# Allegro board 2019-09-09.brd
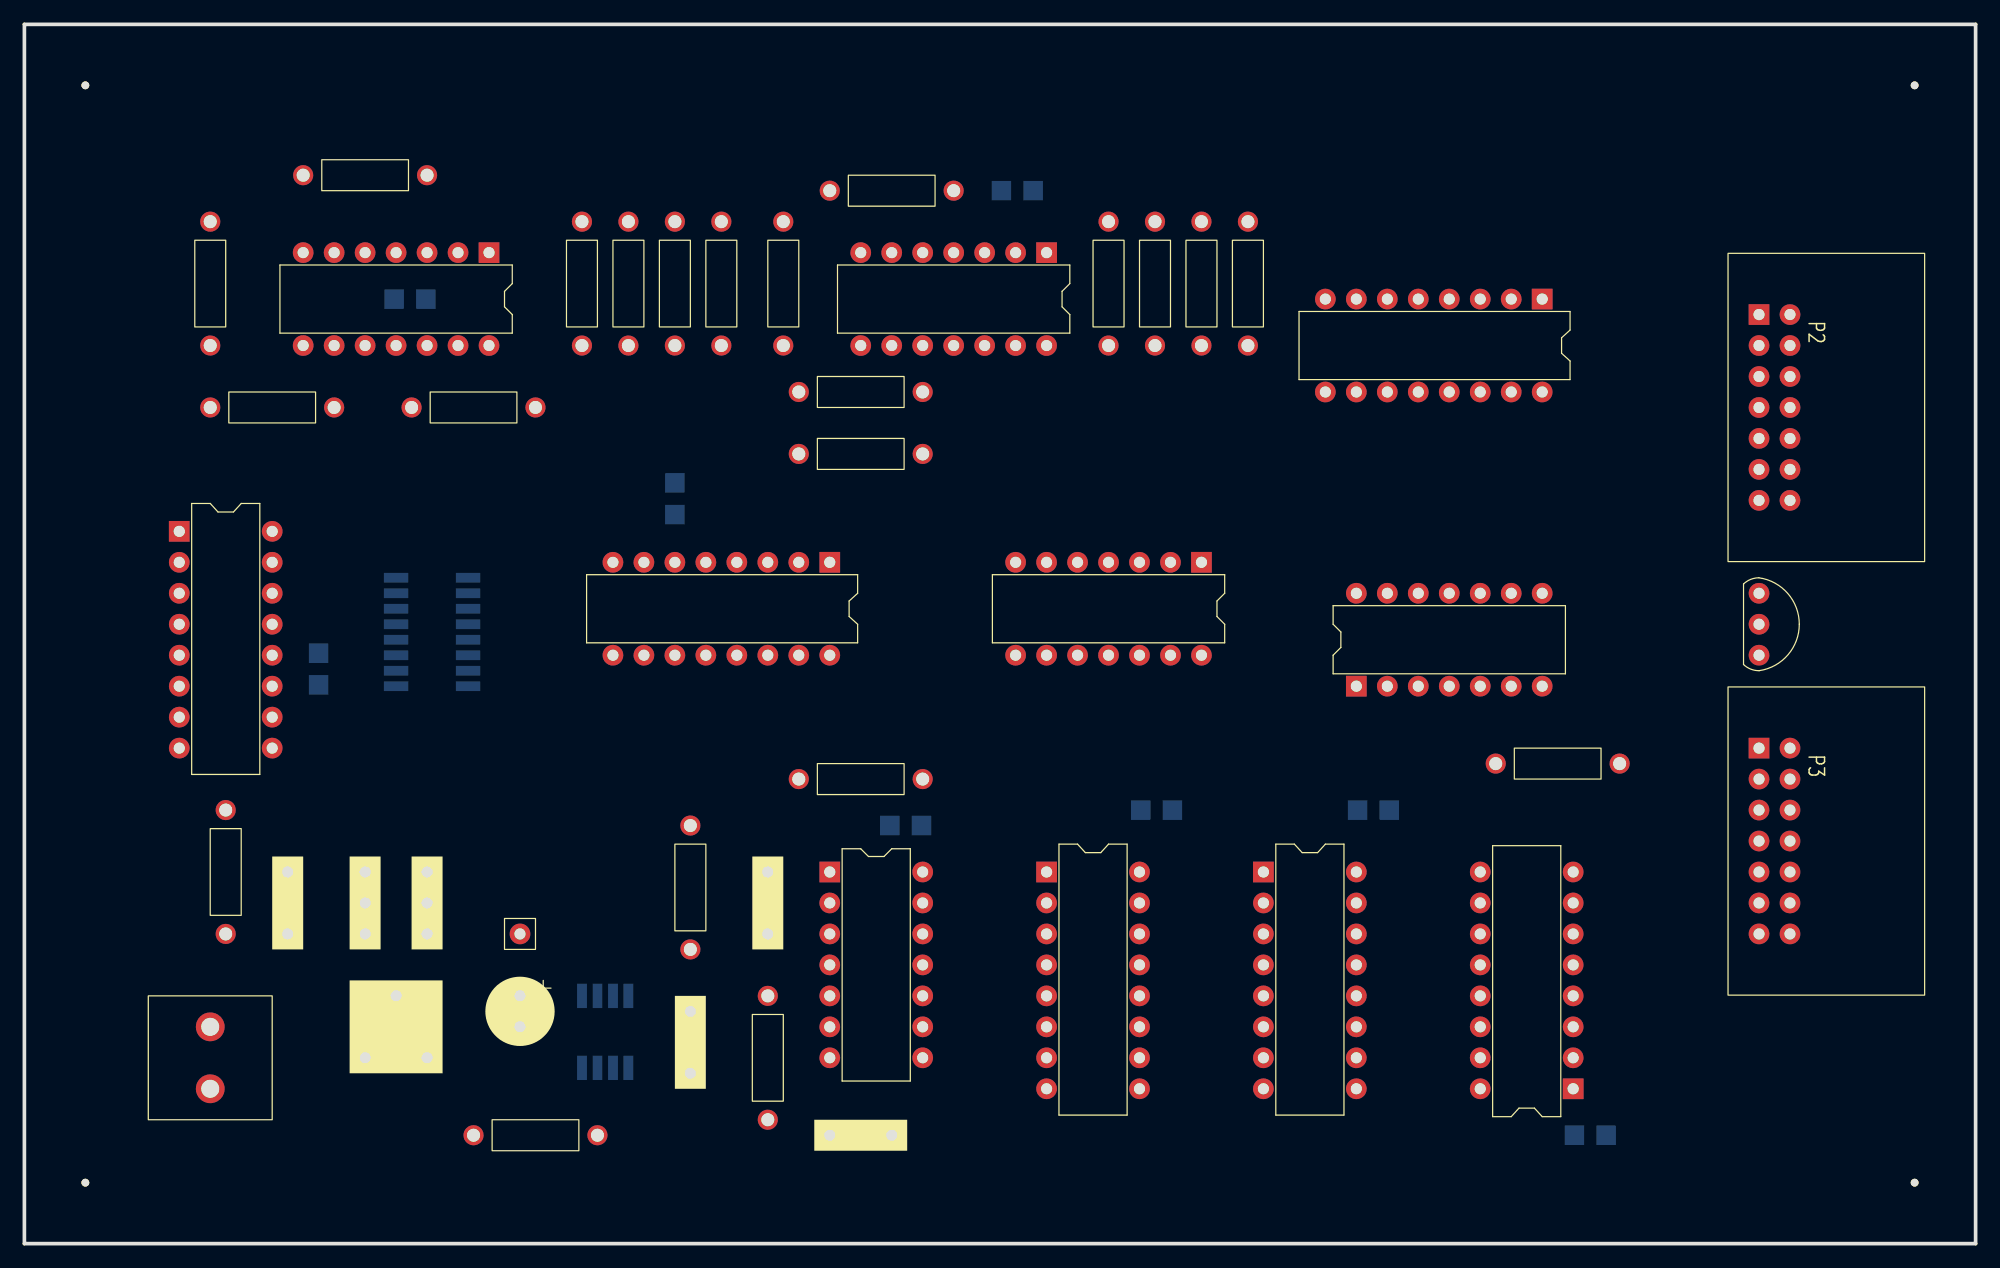
[diagram p0: board, top side]
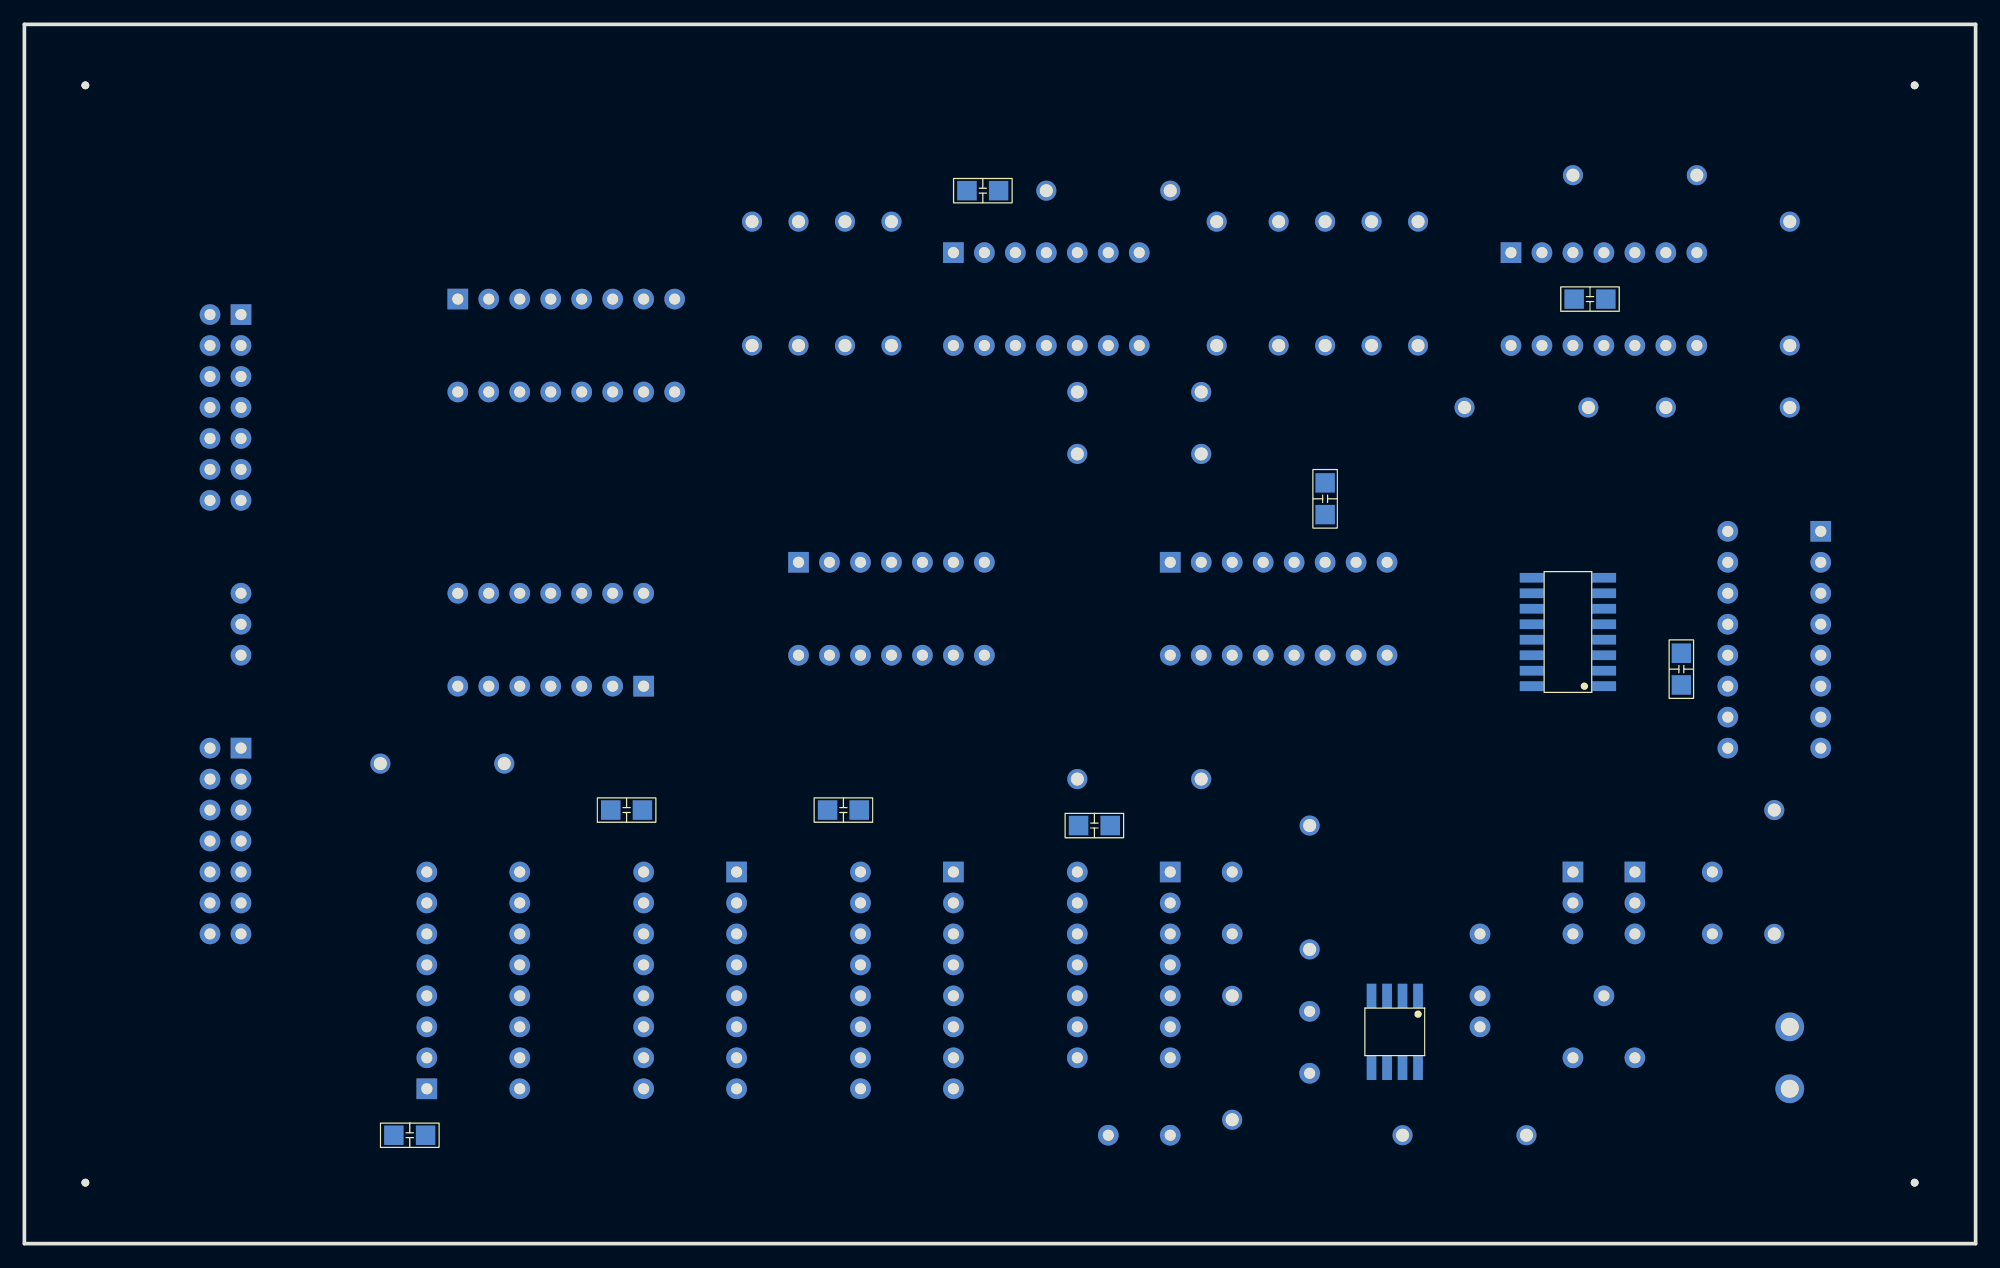
[diagram p1: board, bottom side, seen from below]

Outline 160 x 100 mm; copper layers: TOP, BOTTOM. Coordinates in mm from the lower left corner of the outline.
Outline path: 0,100 0,0 160,0 160,100 0,100

## Design rules (mm)
nets with their own width: min track width 0.5; nets +5V GND

## Placement (name value [footprint] x y rotation side)
C1  10uF  [CAP196]  40.64 20.32 0 top
C2  0.1uF  [CAP300]  54.61 13.97 90 top
C3  0.1uF  [CAP300]  21.59 25.4 90 top
C4  0.001uF  [CAP300]  60.96 30.48 270 top
C5  0.001uF  [CAP300]  71.12 8.89 180 top
C6  0.1uF  [SMDCAP]  33.02 77.47 180 bottom
C7  0.1uF  [SMDCAP]  80.01 86.36 0 bottom
C8  0.1uF  [SMDCAP]  53.34 59.69 90 bottom
C9  0.1uF  [SMDCAP]  109.22 35.56 0 bottom
C10  0.1uF  [SMDCAP]  91.44 35.56 0 bottom
C11  0.1uF  [SMDCAP]  24.13 45.72 90 bottom
C12  0.1uF  [SMDCAP]  127 8.89 0 bottom
C13  0.1uF  [SMDCAP]  73.66 34.29 180 bottom
NOREF  -  [unnamed]  155 5 0 top
NOREF#2  -  [unnamed]  155 95 0 top
NOREF#3  -  [#2]  0 0 90 top
NOREF#4  -  [unnamed]  5 95 0 top
NOREF#5  -  [#2]  0 0 0 top
NOREF#6  -  [unnamed]  5 5 0 top
P1  CON2  [POWER2]  15.24 17.78 270 top
P2  CON14  [JUMPER14]  142.24 76.2 270 top
P3  CON14  [JUMPER14]  142.24 40.64 270 top
Q1  2SC1815  [TO92]  142.24 53.34 270 top
R1  10K  [RES400]  36.83 8.89 270 top
R2  10K  [RES400]  33.02 87.63 90 top
R3  10K  [RES400]  15.24 83.82 180 top
R4  10K  [RES400]  15.24 68.58 270 top
R5  10K  [RES400]  31.75 68.58 270 top
R6  10K  [RES400]  76.2 86.36 90 top
R7  10K  [RES400]  62.23 83.82 180 top
R8  10K  [RES400]  63.5 69.85 270 top
R9  10K  [RES400]  73.66 64.77 90 top
R10  4.7K  [RES400]  45.72 73.66 0 top
R11  4.7K  [RES400]  49.53 73.66 0 top
R12  4.7K  [RES400]  53.34 73.66 0 top
R13  4.7K  [RES400]  57.15 73.66 0 top
R14  4.7K  [RES400]  92.71 73.66 0 top
R15  4.7K  [RES400]  88.9 73.66 0 top
R16  4.7K  [RES400]  100.33 73.66 0 top
R17  4.7K  [RES400]  96.52 73.66 0 top
R18  10K  [RES400]  16.51 35.56 180 top
R19  150  [RES400]  54.61 34.29 180 top
R20  150  [RES400]  60.96 10.16 0 top
R21  10K  [RES400]  63.5 38.1 270 top
R22  10K  [RES400]  130.81 39.37 90 top
TP1  TP  [JUMPER1]  40.64 25.4 0 top
U1  NE555  [SOP8]  45.72 20.32 270 bottom
U2  LM339  [DIP14_3]  38.1 81.28 270 top
U3  LM339  [DIP14_3]  83.82 81.28 270 top
U4  40147  [DIP16_3]  124.46 77.47 270 top
U5  4069  [DIP14_3]  96.52 55.88 270 top
U6  4518  [SOP16]  30.48 45.72 0 bottom
U7  4585  [DIP16_3]  66.04 55.88 270 top
U8  4027  [DIP16_3]  12.7 58.42 0 top
U9  4071  [DIP14_3]  109.22 45.72 90 top
U10  4001  [DIP14_3]  66.04 30.48 0 top
U11  4017  [DIP16_3]  83.82 30.48 0 top
U12  4051  [DIP16_3]  101.6 30.48 0 top
U13  4175  [DIP16_3]  127 12.7 180 top
VR1  1M  [RESADJ]  33.02 15.24 270 top
VR2  100K  [JUMPER3]  27.94 30.48 270 top
VR3  10K  [JUMPER3]  33.02 30.48 270 top

## Library data of the parts
C1 = Cap Pol
C2-C5 = Cap NP: Tolerance: ***; User Part Number: ***
C6-C13 = Cap TEXT
P1 = CON2
P2 P3 = CON14: User Part Number: ***
Q1 = 2SC1815
R1-R22 = resistor: Tolerance: ***; User Part Number: ***
TP1 = TP: User Part Number: ***
U1 = NE555
U2 U3 = LM339: Tolerance: ***; User Part Number: ***
U4 = 40147: Tolerance: ***; User Part Number: ***
U5 = 4069: Tolerance: ***; User Part Number: ***
U6 = 4518
U7 = 4585: Tolerance: ***; User Part Number: ***
U8 = 4027_0: Tolerance: ***; User Part Number: ***
U9 = 4071: Tolerance: ***; User Part Number: ***
U10 = 4001: Tolerance: ***; User Part Number: ***
U11 = 4017: Tolerance: ***; User Part Number: ***
U12 = 4051: Tolerance: ***; User Part Number: ***
U13 = 4175: Tolerance: ***; User Part Number: ***
VR1 = VR1: Tolerance: ***; User Part Number: ***
VR2 VR3 = VR2: User Part Number: ***

## Footprints (pads in the part's own frame, mm; a bottom-side part is the same pattern mirrored in y, then rotated)
CAP196
  round 1.7 hole 0.91: 1(0,0) 2(0,-2.54)
CAP300
  round 1.7 hole 0.91: 1(0,0) 2(5.08,0)
DIP14_3
  rect 1.7x1.7 hole 0.914: 1(0,0)
  round 1.7 hole 0.91: 2(0,-2.54) 3(0,-5.08) 4(0,-7.62) 5(0,-10.16) 6(0,-12.7) 7(0,-15.24) 8(7.62,-15.24) 9(7.62,-12.7) 10(7.62,-10.16) 11(7.62,-7.62) 12(7.62,-5.08) 13(7.62,-2.54) 14(7.62,0)
DIP16_3
  rect 1.7x1.7 hole 0.914: 1(0,0)
  round 1.7 hole 0.91: 2(0,-2.54) 3(0,-5.08) 4(0,-7.62) 5(0,-10.16) 6(0,-12.7) 7(0,-15.24) 8(0,-17.78) 9(7.62,-17.78) 10(7.62,-15.24) 11(7.62,-12.7) 12(7.62,-10.16) 13(7.62,-7.62) 14(7.62,-5.08) 15(7.62,-2.54) 16(7.62,0)
JUMPER1
  round 1.7 hole 0.91: 1(0,0)
JUMPER3
  rect 1.7x1.7 hole 0.914: 1(0,0)
  round 1.7 hole 0.91: 2(2.54,0) 3(5.08,0)
JUMPER14
  rect 1.7x1.7 hole 0.914: 1(0,0)
  round 1.7 hole 0.91: 2(0,2.54) 3(2.54,0) 4(2.54,2.54) 5(5.08,0) 6(5.08,2.54) 7(7.62,0) 8(7.62,2.54) 9(10.16,0) 10(10.16,2.54) 11(12.7,0) 12(12.7,2.54) 13(15.24,0) 14(15.24,2.54)
POWER2
  round 2.362 hole 1.473: 1(0,0) 2(5.08,0)
RES400
  round 1.651 hole 1.067: 1(0,0) 2(0,10.16)
RESADJ
  round 1.7 hole 0.91: 1(0,0) 2(-5.08,-2.54) 3(0,-5.08)
SMDCAP
  rect 1.6x1.6 smd: 1(0.1,0) 2(2.7,0)
SOP8
  rect 2x0.8 smd: 1(0,0) 2(0,-1.27) 3(0,-2.54) 4(0,-3.81) 5(5.9,-3.81) 6(5.9,-2.54) 7(5.9,-1.27) 8(5.9,0)
SOP16
  rect 2x0.8 smd: 1(0,0) 2(0,-1.27) 3(0,-2.54) 4(0,-3.81) 5(0,-5.08) 6(0,-6.35) 7(0,-7.62) 8(0,-8.89) 9(5.9,-8.89) 10(5.9,-7.62) 11(5.9,-6.35) 12(5.9,-5.08) 13(5.9,-3.81) 14(5.9,-2.54) 15(5.9,-1.27) 16(5.9,0)
TO92
  round 1.7 hole 0.91: 1(0,0) 2(2.54,0) 3(5.08,0)
unnamed
  round 0.635 hole 3 unplated: (0,0)

## Nets
+5V: C3.1 C6.1 C7.1 C8.1 C9.1 C10.1 C11.1 C12.1 C13.1 P1.1 P2.11 R1.1 R10.1 R11.1 R12.1 R13.1 R14.1 R15.1 R16.1 R17.1 R21.1 U1.4(RST) U1.8(VCC) U2.3 U3.3 U4.10(I\9\) U4.15(I\0\) U4.16(VCC) U5.14 U6.16 U7.4(A>BIN) U7.5(A<BIN) U7.6(A=BIN) U7.16(VCC) U8.10(J) U8.11(K) U8.16 U9.14 U10.14 U11.16(VCC) U12.16(VCC) U13.1(R\S\T\) U13.16(VCC) VR2.3(A) VR3.3(A)
GND: C1.2 C2.2 C6.2 C7.2 C8.2 C9.2 C10.2 C11.2 C12.2 C13.2 P1.2 P2.13 Q1.1(B) R9.2 R18.2 U1.1(GND) U2.12 U3.12 U4.8(GND) U5.7 U6.1(CLK) U6.8 U6.9(CLK) U7.8(GND) U8.8 U8.12(RST) U9.7 U10.2(I1) U10.7 U11.8(GND) U11.13(C\K\E\N\) U12.7(VEE) U12.8(GND) U12.9(C) U13.8(GND) VR2.1(WIPER) VR3.1(WIPER)
AD0: P2.14
AD1: P2.12
AD2: P2.10
AD3: P2.8
AD4: P2.6
AD5: P2.4
AD6: P2.2
AD7: P2.1
CLK: TP1.1 U1.3(OUT) U6.2(EN)
MOTOR-GND: Q1.2(C)
MOTOR-GND2: P3.6
MR: U6.7(CLR) U6.15(CLR) U8.14(Q\) U11.15(RST) U12.6(E\N\)
MR2: P3.13 U8.15(Q)
SW1: P3.14 U9.2(I1)
SW2: P3.12 U9.5(I0) U13.4(D0)
SW3: P3.10 U9.6(I1) U13.5(D1)
SW4: P3.8 U9.9(I1) U13.12(D2)
SWLED1: P3.11 U13.2(Q0)
SWLED2: P3.9 U12.11(A) U13.7(Q1)
SWLED3: P3.7 U12.10(B) U13.10(Q2)
VR3: P2.5 VR3.2(B)
VR-LED: P2.3 U2.5(+IN) U2.7(+IN) U2.9(+IN) U2.11(+IN) U3.5(+IN) U3.7(+IN) U3.9(+IN) U3.11(+IN)
N00909: U6.11(Q0) U7.11(B0)
N00911: U6.12(Q1) U7.9(B1)
N00913: U6.13(Q2) U7.1(B2)
N00915: U6.14(Q3) U7.14(B3)
N01114: R2.2 R3.1 U2.6(-IN)
N01118: R2.1 U2.4(-IN) VR2.2(B)
N01157: R3.2 R4.1 U2.8(-IN)
N01285: R4.2 R5.1 U2.10(-IN)
N01359: R5.2 R6.1 U3.4(-IN)
N01433: R6.2 R7.1 U3.6(-IN)
N01507: R7.2 R8.1 U3.8(-IN)
N01581: R8.2 R9.1 U3.10(-IN)
N01951: R10.2 U2.2(OUT) U4.11(I\1\)
N01979: R11.2 U2.1(OUT) U4.12(I\2\)
N02007: R12.2 U2.14(OUT) U4.13(I\3\)
N02035: R13.2 U2.13(OUT) U4.1(I\4\)
N02063: R14.2 U3.2(OUT) U4.2(I\5\)
N02091: R15.2 U3.1(OUT) U4.3(I\6\)
N02119: R16.2 U3.14(OUT) U4.4(I\7\)
N02698: R17.2 U3.13(OUT) U4.5(I\8\)
N02745: U4.9(A\) U5.1(I)
N02749: U4.7(B\) U5.3(I)
N02756: U4.6(C\) U5.5(I)
N02768: U4.14(D\) U5.9(I)
N02780: U5.8(O) U7.15(A3)
N02795: U5.6(O) U7.2(A2)
N02807: U5.4(O) U7.7(A1)
N02819: U5.2(O) U7.10(A0)
N02831: U6.6(Q3) U6.10(EN)
N02980: U7.3(A=BOUT) U9.1(I0)
N03005: U8.13(CLK) U9.3(O)
N03511: R1.2 U1.7(DISC) VR1.2
N03515: C1.1 U1.2(TRIG) U1.6(THR) VR1.1
N03626: C3.2 R18.1 U8.9(SET)
N04229: C2.1 U1.5(CV)
N08454: C4.1 R19.1 U10.1(I0)
N08498: C4.2 R20.1 U10.4(O) U11.14(CLK)
N08556: C5.2 R20.2 U10.5(I0) U10.6(I1)
N08594: C5.1 R19.2 U10.3(O)
N08618: U10.8(I0) U11.3(0)
N08635: U11.11(9) U12.15(X2)
N08644: U11.5(6) U12.14(X1)
N08656: U11.10(4) U12.13(X0)
N08737: R21.2 U10.13(I1) U12.3(X)
N08761: U10.10(O) U10.12(I0)
N08778: R22.2 U10.9(I1) U10.11(O)
N08928: Q1.3(E) R22.1
N08958: U9.4(O) U9.8(I0)
N08962: U9.10(O) U13.9(CLK)

Pads without a net: P2 7 9; P3 1 2 3 4 5; U5 10 11 12 13; U6 3 4 5; U7 12 13; U8 1 2 3 4 5 6 7; U9 11 12 13; U11 1 2 4 6 7 9 12; U12 1 2 4 5 12; U13 3 6 11 13 14 15; VR1 3

## Text on the board
DEVICE_TYPE_TOP: FIGURE | SIZE | 3.0 | DRILL CHART: TOP to BOTTOM | ALL UNITS ARE IN MILLIMETERS | PLATED | NON-PLATED | QTY | 4
